# Altium PCB PCB1.PcbDoc
Units mm, origin at the board's own origin, x right, y up, seen from the top; angles counter-clockwise.
Board outline 41.78 x 22.99 mm, 2 copper layers (Top Layer, Bottom Layer); 9 components, 6 nets, 19 pads, 0 vias.
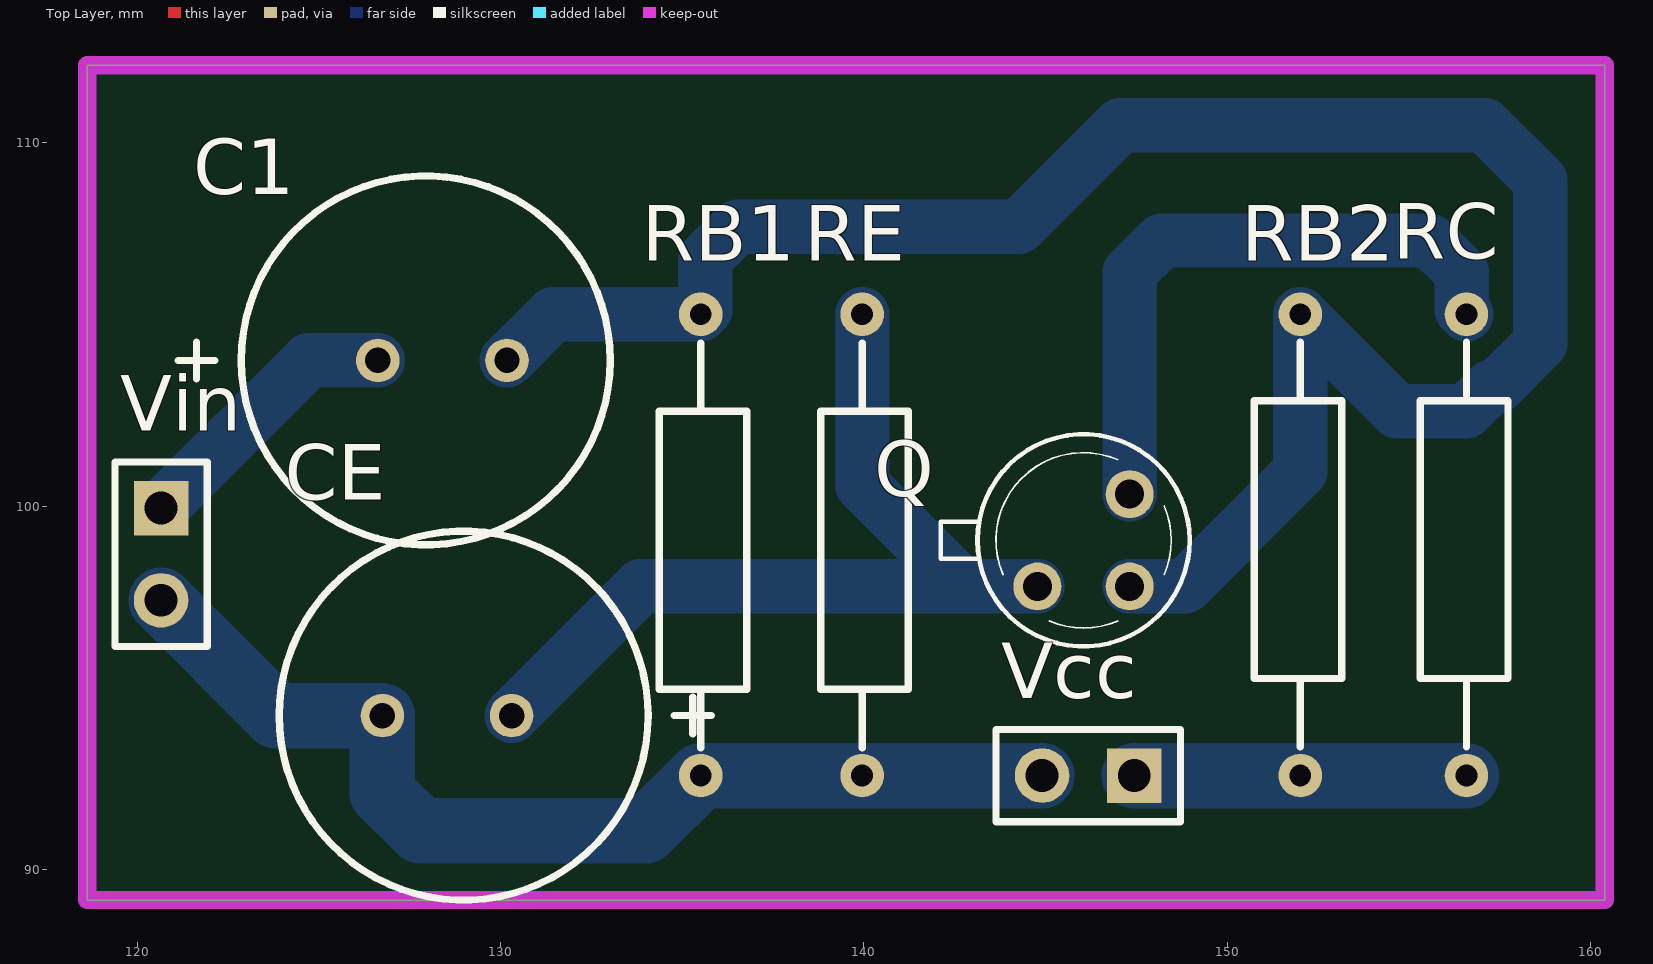
[diagram p0: Top Layer view]
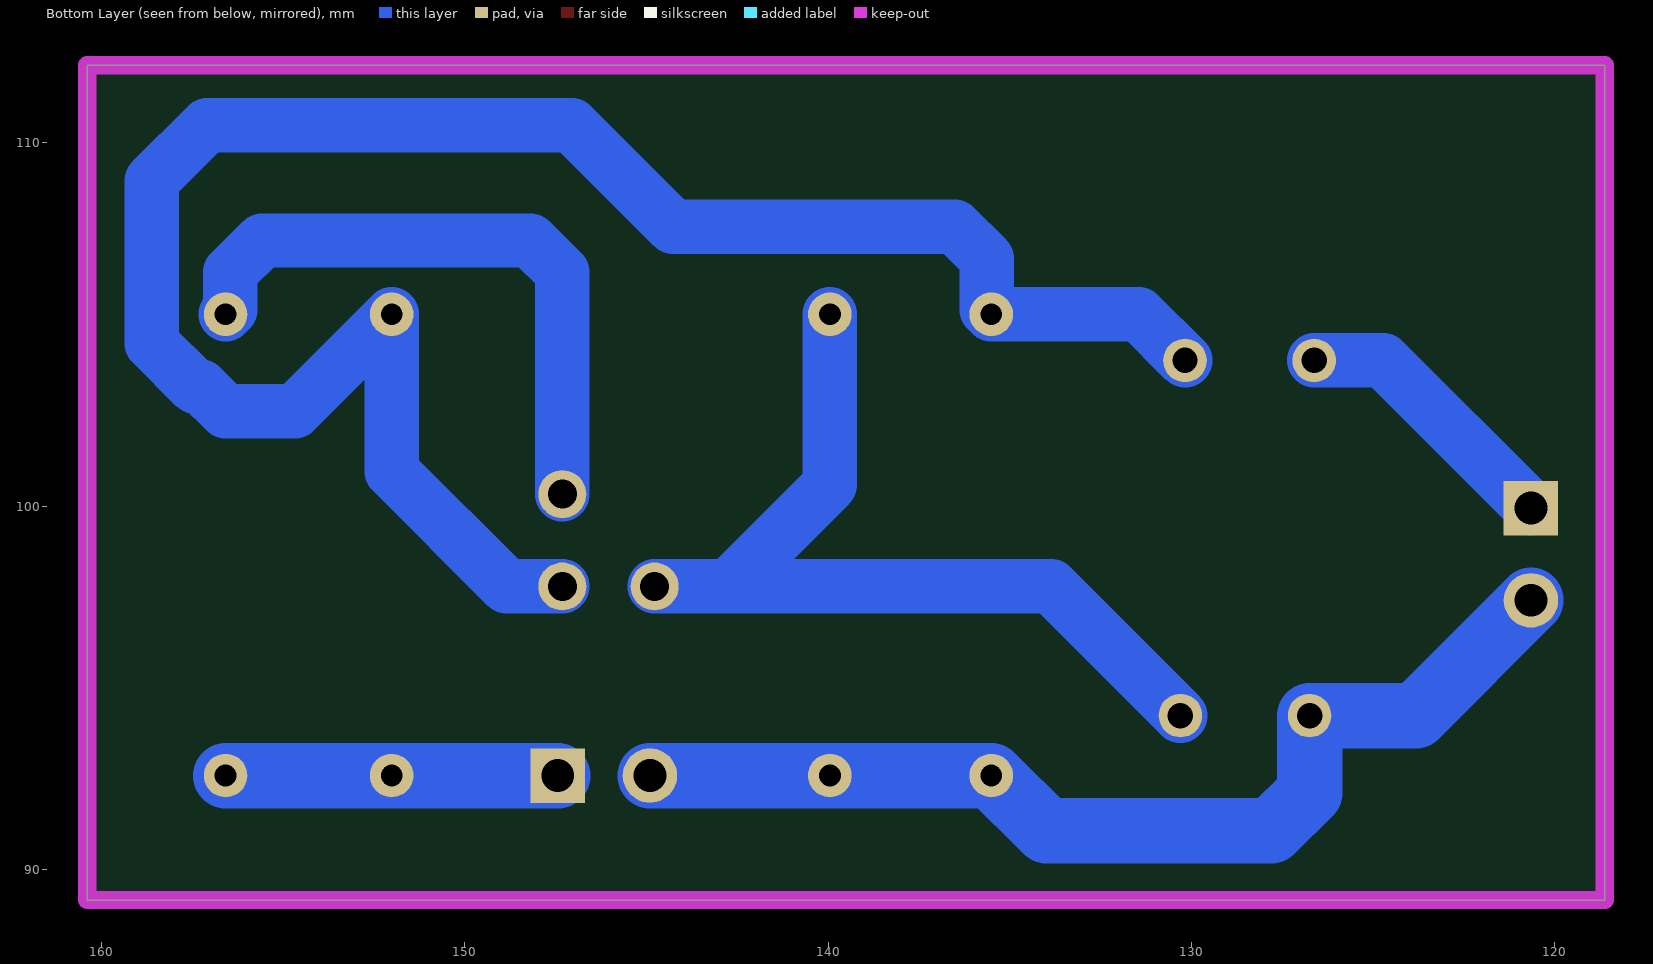
[diagram p1: Bottom Layer view, seen from below]
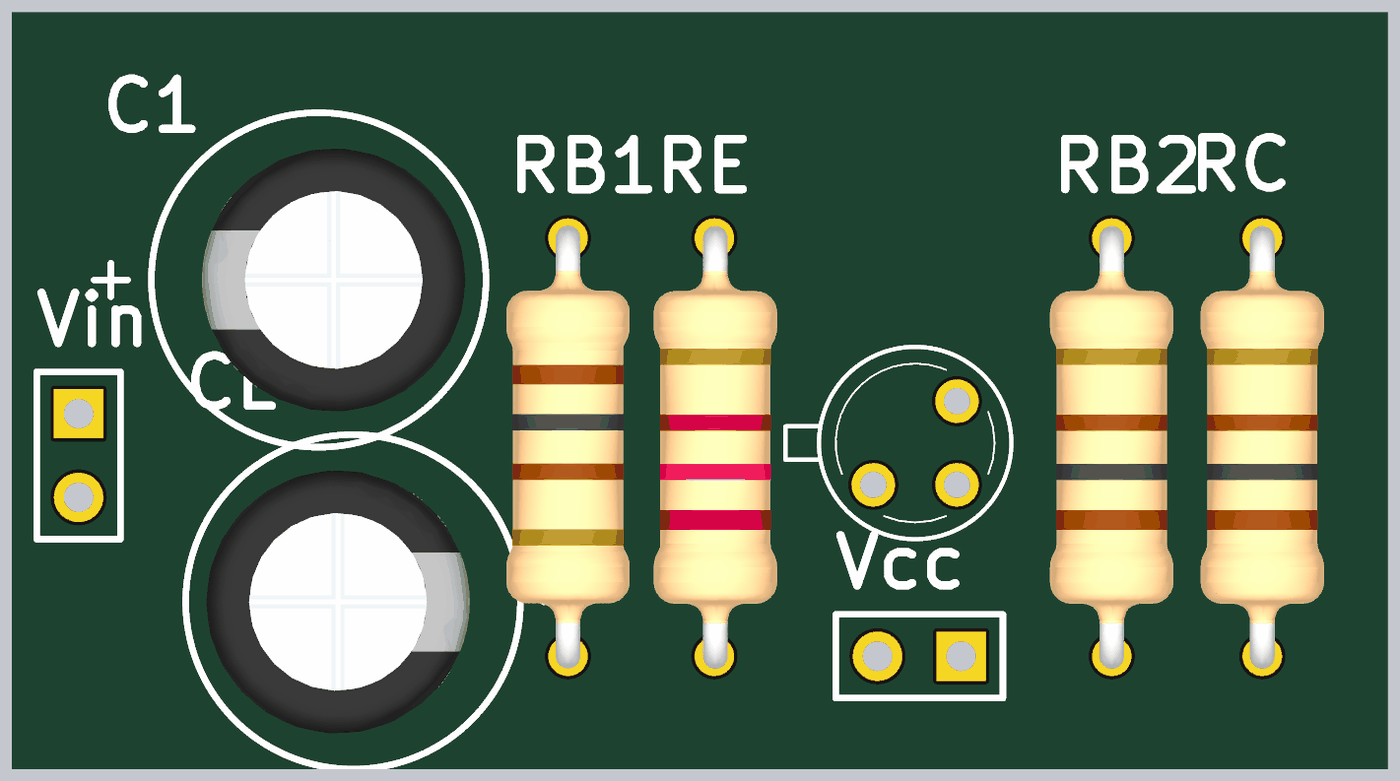
[diagram p2: 3D render of the assembled board from above, using the file's embedded part models]

## Layer stack, top to bottom
Top Solder: solder mask 0.0102, Solder Resist, Dk 3.5
Top Layer: signal copper 0.0356
Dielectric 1: dielectric 0.32, FR-4, Dk 4.8
Bottom Layer: signal copper 0.0356
Bottom Solder: solder mask 0.0102, Solder Resist, Dk 3.5

## Board outline
118.618,89.154 118.618,112.141 160.401,112.141 160.401,89.154

## Design rules (kind name [scope] priority, off if disabled: settings)
Clearance [All] p1: gap=0.5 ignorepadtopadclearanceinfootprint=FALSE
PolygonConnect [All] p1: connectstyle=Relief reliefconductorwidth=0.254 reliefentries=4 polygonreliefangle="90 Angle" airgapwidth=0.254
RoutingVias [All] p1: holewidth=0.711 width=1.27 viastyle="Through Hole" minholewidth=0.711 minwidth=1.27 maxholewidth=0.711 maxwidth=1.27
SolderMaskExpansion [All] p1: expansion=0.102 istentingtop=FALSE
Width [All] p1: maxlimit=1.8 minlimit=1 preferedwidth=1.5
30 further rules are at their usual default settings.

## Components (designator, comment, footprint, x,y, rotation, side; value= is the part's Value field where it differs from the comment)
C1 "Cap" Cap 134.239,104.013 r180 top value=100uF
CE "Cap" Cap 122.682,94.234 r0 top value=100uF
Q "BC107" TO18 146.05,99.06 r0 top
RB1 "Res1" "Res 100-DIP" 135.509,91.186 r90 top value=100
RB2 "Res1" "Res 100-DIP" 152.019,106.68 r270 top value=100
RC "Res1" "Res 100-DIP" 156.591,106.68 r270 top value=5.6
RE "Res1" "Res 2.7-DIP" 139.954,91.186 r90 top
Vcc "Header 2" HDR1X2 147.447,92.583 r180 top
Vin "Header 2" HDR1X2 120.65,99.949 r270 top

## Footprints (in the part's own frame and the unit in brackets; to place one, negate y for a bottom-side part, rotate by r counter-clockwise, add the part's x,y. Pads: shape width x height; smd on the part's side, far side on the other; paste and mask are expansions set on the pad)
Cap [mm]
  round 1.2 hole 0.7: 1(4.064,0) 2(7.62,0)
  silkscreen extent 1.22,-5.08 13.12,5.08, body extent 1.84,-4 9.84,4, height 12.43
HDR1X2 [mm] "Connector; Header; 2 Position"
  rect 1.5x1.5 hole 0.9: 1(0,0)
  round 1.5 hole 0.9: 2(2.54,0)
  silkscreen extent -1.27,-1.27 3.81,1.27
"Res 2.7-DIP" [mm]
  round 1.2 hole 0.6: 1(1.397,0) 2(14.097,0)
  silkscreen extent 2.16,-1.27 13.3,1.14, body extent 1.02,-1.91 14.47,1.84, height 3.79
"Res 100-DIP" [mm]
  round 1.2 hole 0.6: 1(1.397,0) 2(14.097,0)
  silkscreen extent 2.16,-1.27 13.3,1.14, body extent 1.03,-1.88 14.48,1.87, height 3.79
TO18 [mil]
  round 52 hole 31.5: 1(-50,-50) 2(50,-50) 3(50,50)
  silkscreen extent -155,-115 115,115

## Part data
Q: "Bipolar _BJT_ Transistor NPN 45V 200mA 150MHz 600mW Through Hole TO-18", Package="TO-18 STMicroelectronics", Availability=Unavailable, MF=STMicroelectronics, MP=BC107, Price=None, SnapEDA_Link=https://www.snapeda.com/parts/BC107/STMicroelectronics/view-part/4705028/?ref=snap
RB1 RB2 RC: library part "Res 100-DIP_8", LatestRevisionDate=17-Jul-2002, LatestRevisionNote="Re-released for DXP Platform.", PackageReference=AXIAL-0.4, Published=8-Jun-2000, Publisher="Altium Limited"
RE: library part "Res 2.7-DIP", LatestRevisionDate=17-Jul-2002, LatestRevisionNote="Re-released for DXP Platform.", PackageReference=AXIAL-0.4, Published=8-Jun-2000, Publisher="Altium Limited", RE=3.7K
Vcc Vin: "Header, 2-Pin", LatestRevisionDate=17-Jul-2002, LatestRevisionNote="Re-released for DXP Platform.", Publisher="Altium Limited"
C1 CE: LatestRevisionDate=17-Jul-2002, LatestRevisionNote="Re-released for DXP Platform.", PackageReference=RAD-0.3, Published=8-Jun-2000, Publisher="Altium Limited"

## Nets (pads, with @x,y where several pads share a name; then routed paths per layer and width w, separated by ;. In a path a pad name is that pad's centre, name@x,y a point inside that pad or via, vN(x,y) a via of type N, cw(c..) or ccw(c..) an arc to the next point about the centre after c; other vN are vias at no path point)
GND: CE.1 RB1.1 RE.1 Vcc.2 Vin.2 | length 28.8
  Bottom Layer w1.8: Vin.2 123.825,94.234 CE.1 126.746,92.113 127.8,91.059 133.985,91.059 RB1.1 RE.1 Vcc.2
NetC1_1: C1.1 Q.2 RB1.2 RB2.1 | length 55.9
  Bottom Layer w1.5: C1.1 131.445,105.283 RB1.2 135.636,105.41 135.636,106.817 136.515,107.696 144.272,107.696 147.066,110.49 157.099,110.49 158.623,108.966 158.623,104.487 157.419,103.283 157.258,103.283 156.591,102.616 154.686,102.616 RB2.1 152.019,100.965 148.844,97.79 Q.2
NetC1_2: C1.2 Vin.1 | length 7.7
  Bottom Layer w1.5: Vin.1 124.714,104.013 C1.2
NetCE_2: CE.2 Q.1 RE.2 | length 24.6
  Bottom Layer w1.5: CE.2 133.858,97.79 142.748,97.79 ; RE.2 139.954,100.584 142.748,97.79 ; Q.1 142.748,97.79
NetQ_3: Q.3 RC.1 | length 17.2
  Bottom Layer w1.5: Q.3 147.32,106.436 148.199,107.315 155.585,107.315 156.464,106.436 156.464,105.41 RC.1
NetRB2_2: RB2.2 RC.2 Vcc.1 | length 9.1
  Bottom Layer w1.8: Vcc.1 RB2.2 RC.2

## Keep-outs
Keep-Out Layer:
  the board outline again, w0.5

## Text inside footprints (layer, text, board x,y; h text height)
Q: Mechanical 13 "1" at 144.145,97.79 h1.27; Mechanical 13 "2" at 146.685,97.79 h1.27; Mechanical 13 "3" at 146.05,99.695 h1.27